# Altium PCB PCB.PcbDoc
Units mil, origin at the board's own origin, x right, y up, seen from the top; angles counter-clockwise.
Board outline 2500 x 2500 mil, 2 copper layers (Top Layer, Bottom Layer); 24 components, 42 nets, 148 pads, 107 vias.
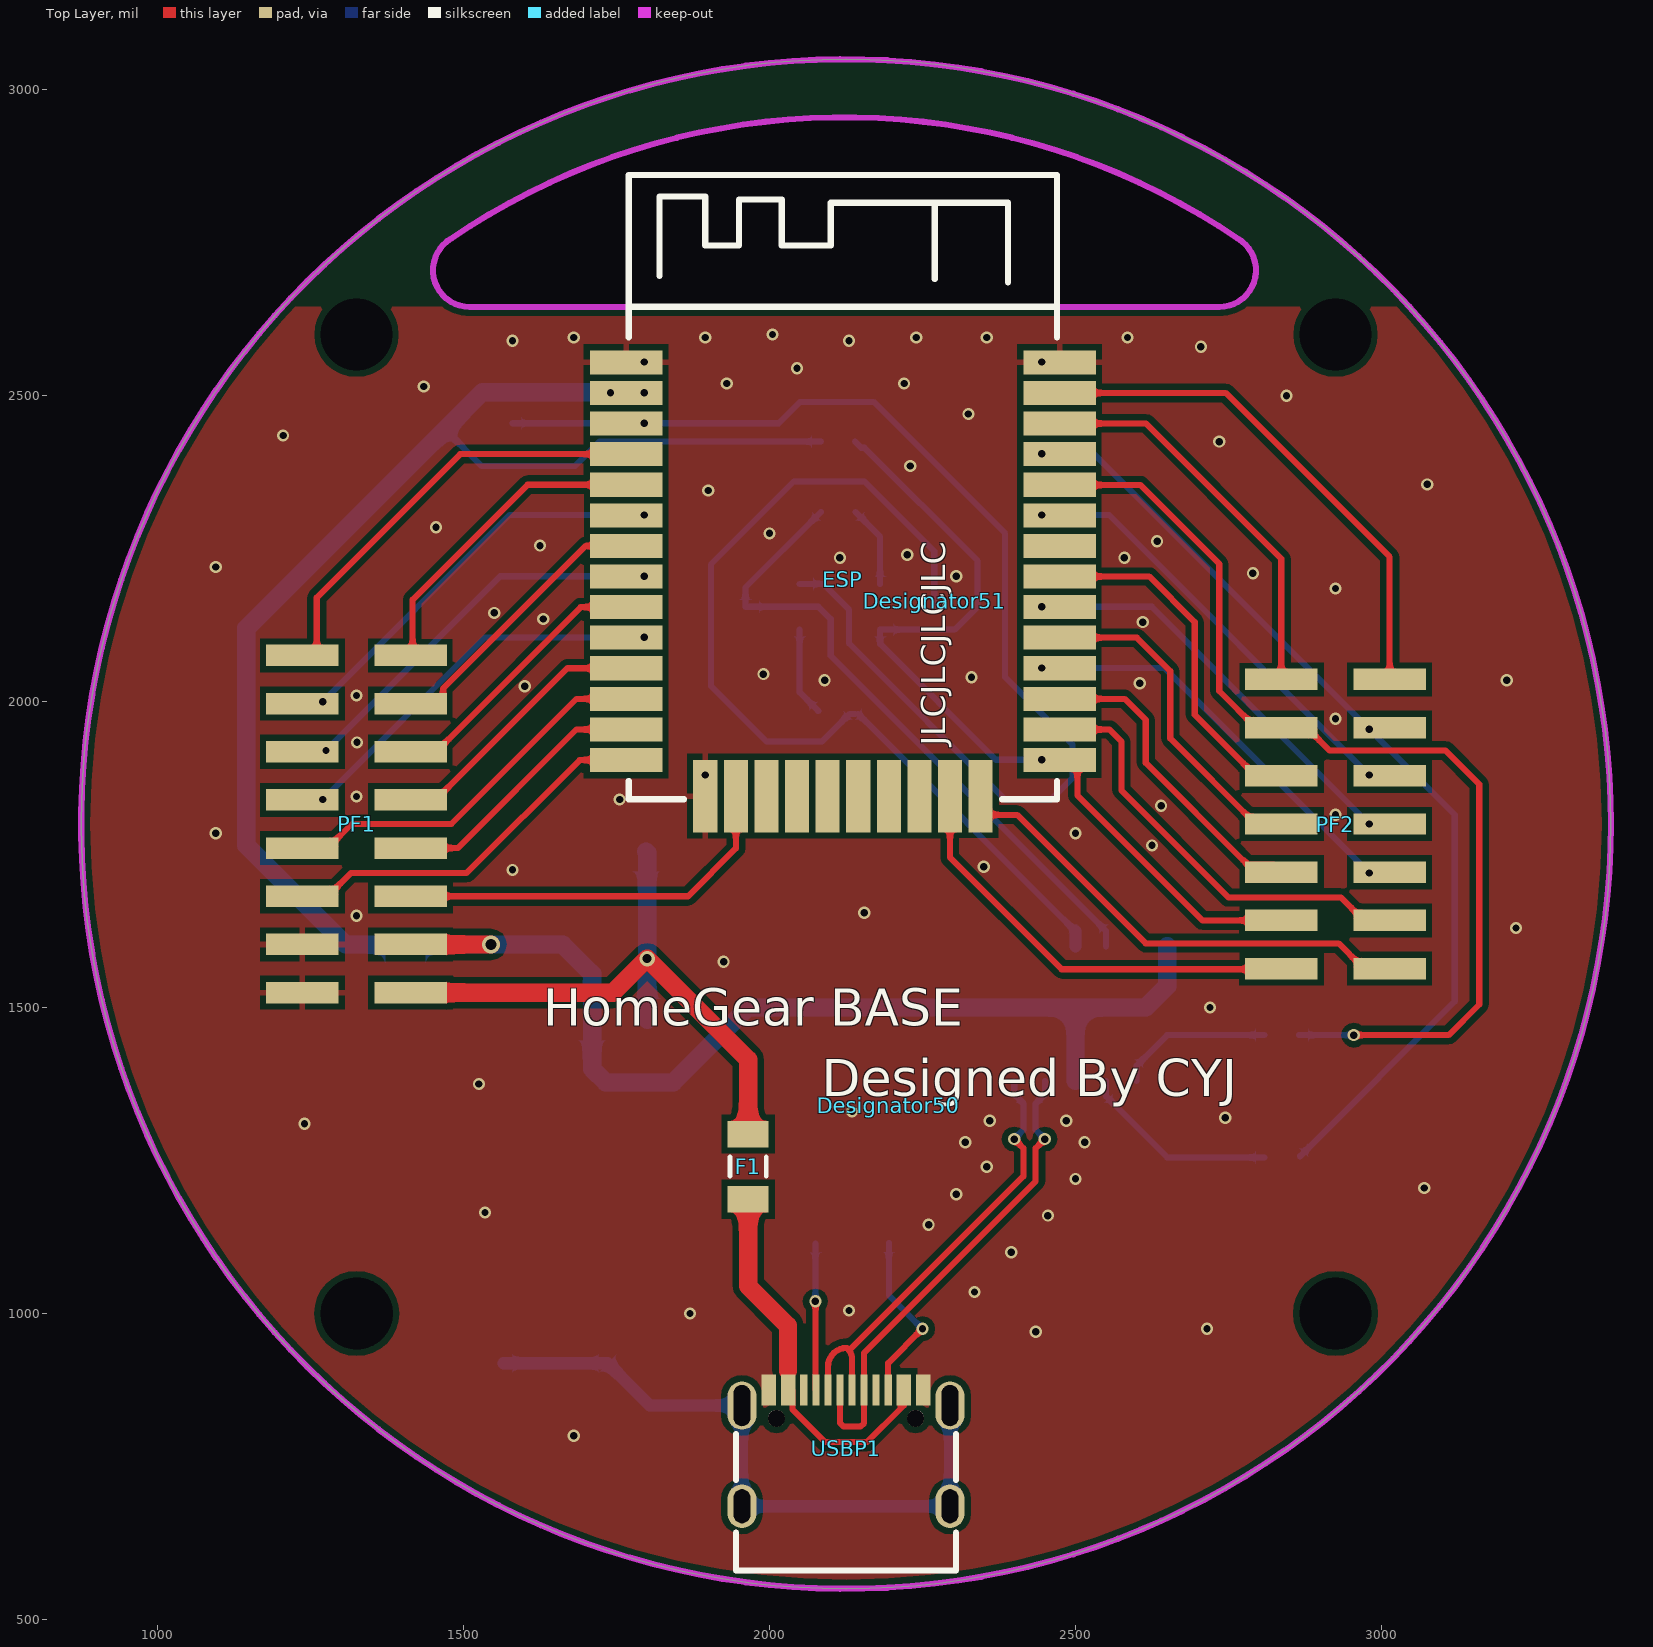
[diagram p0: Top Layer view]
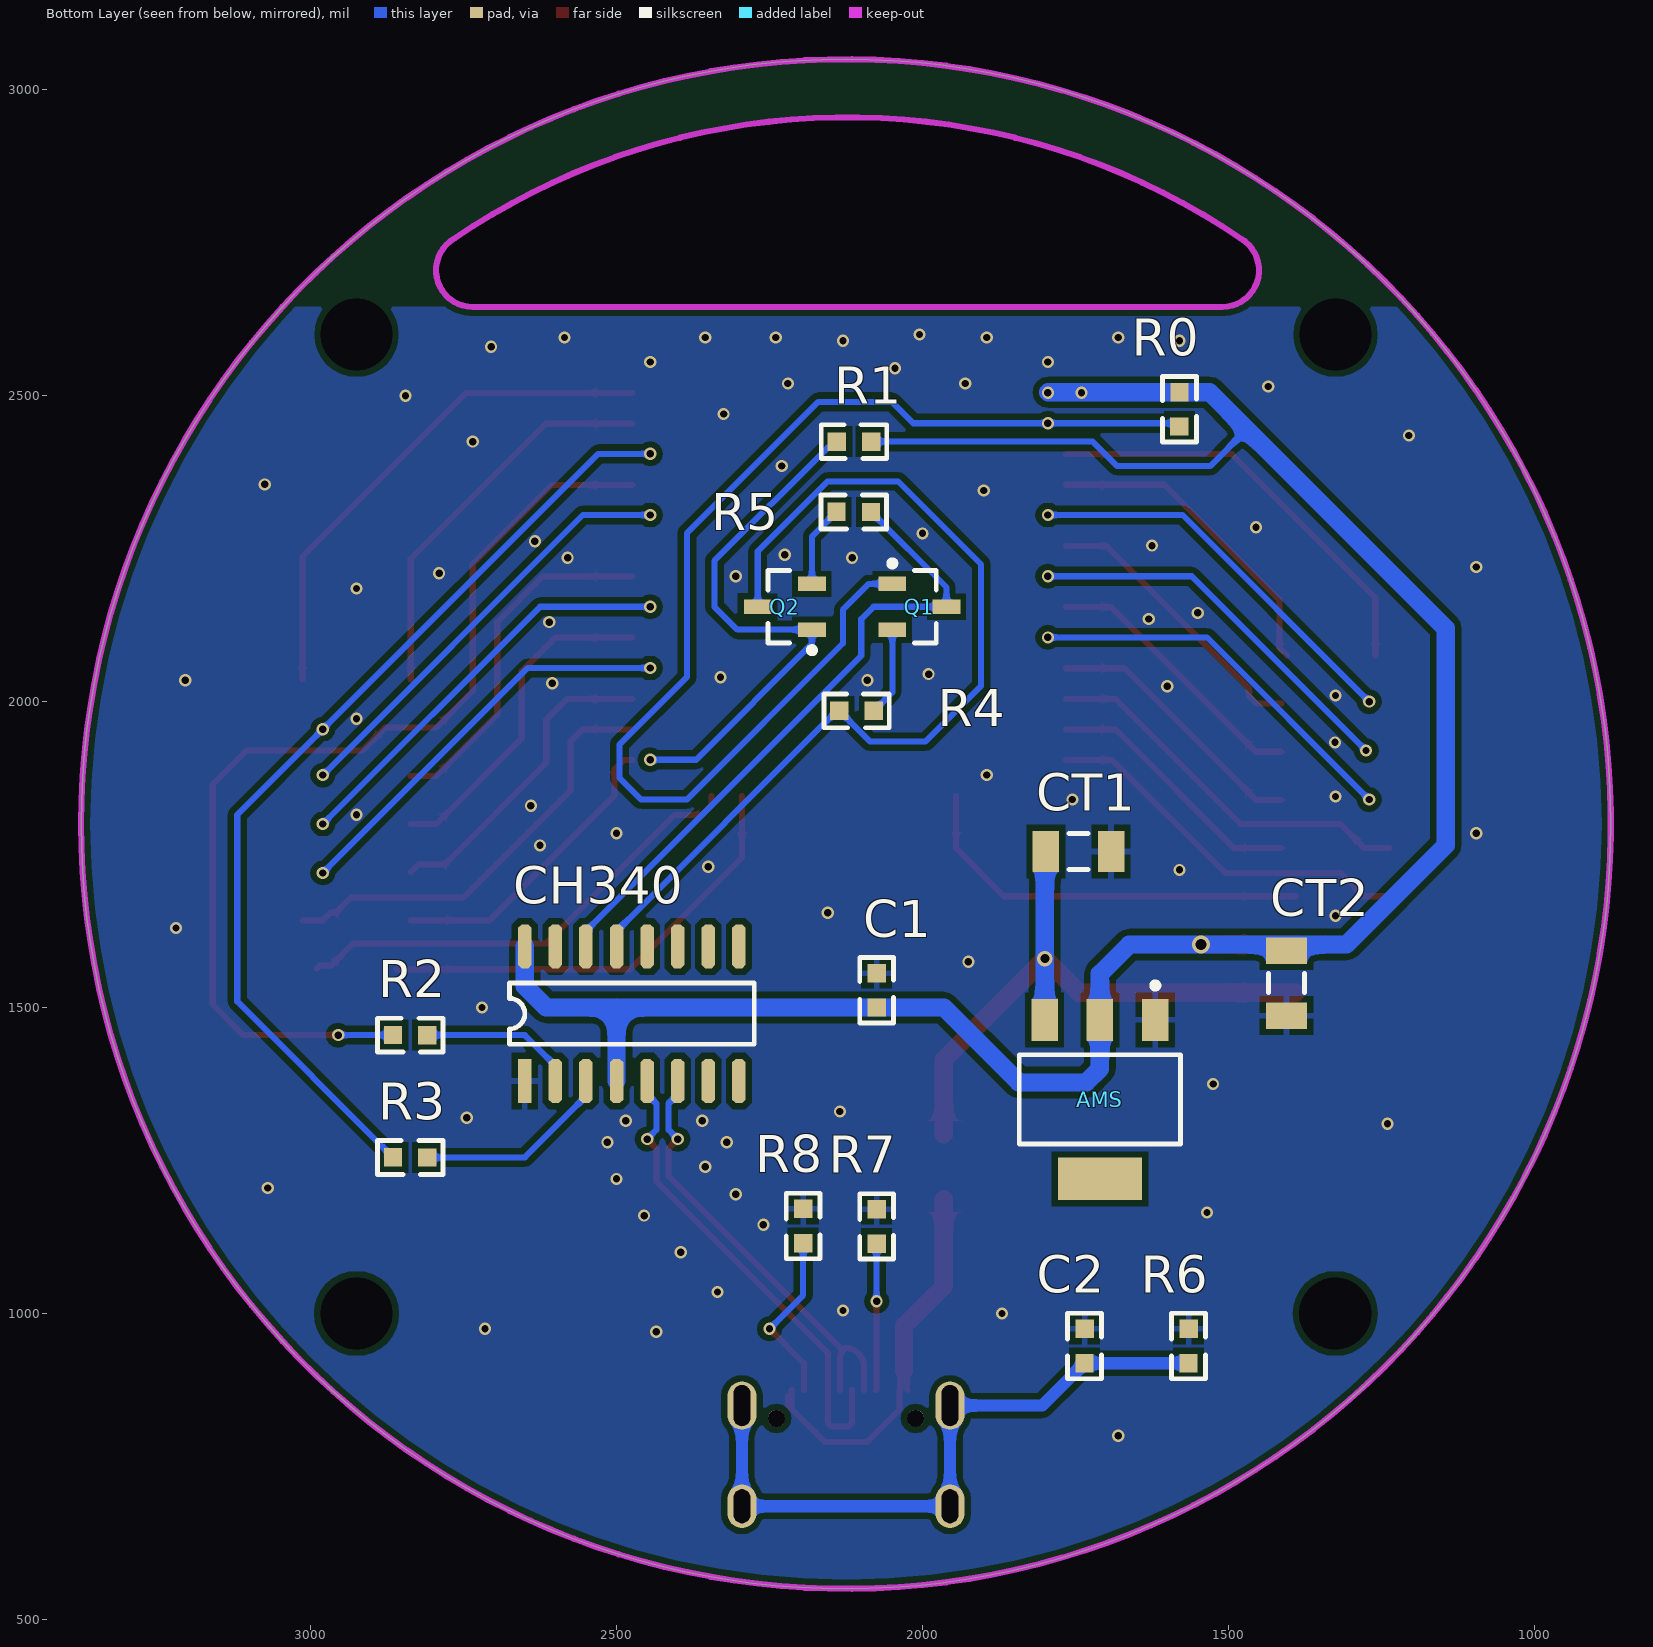
[diagram p1: Bottom Layer view, seen from below]
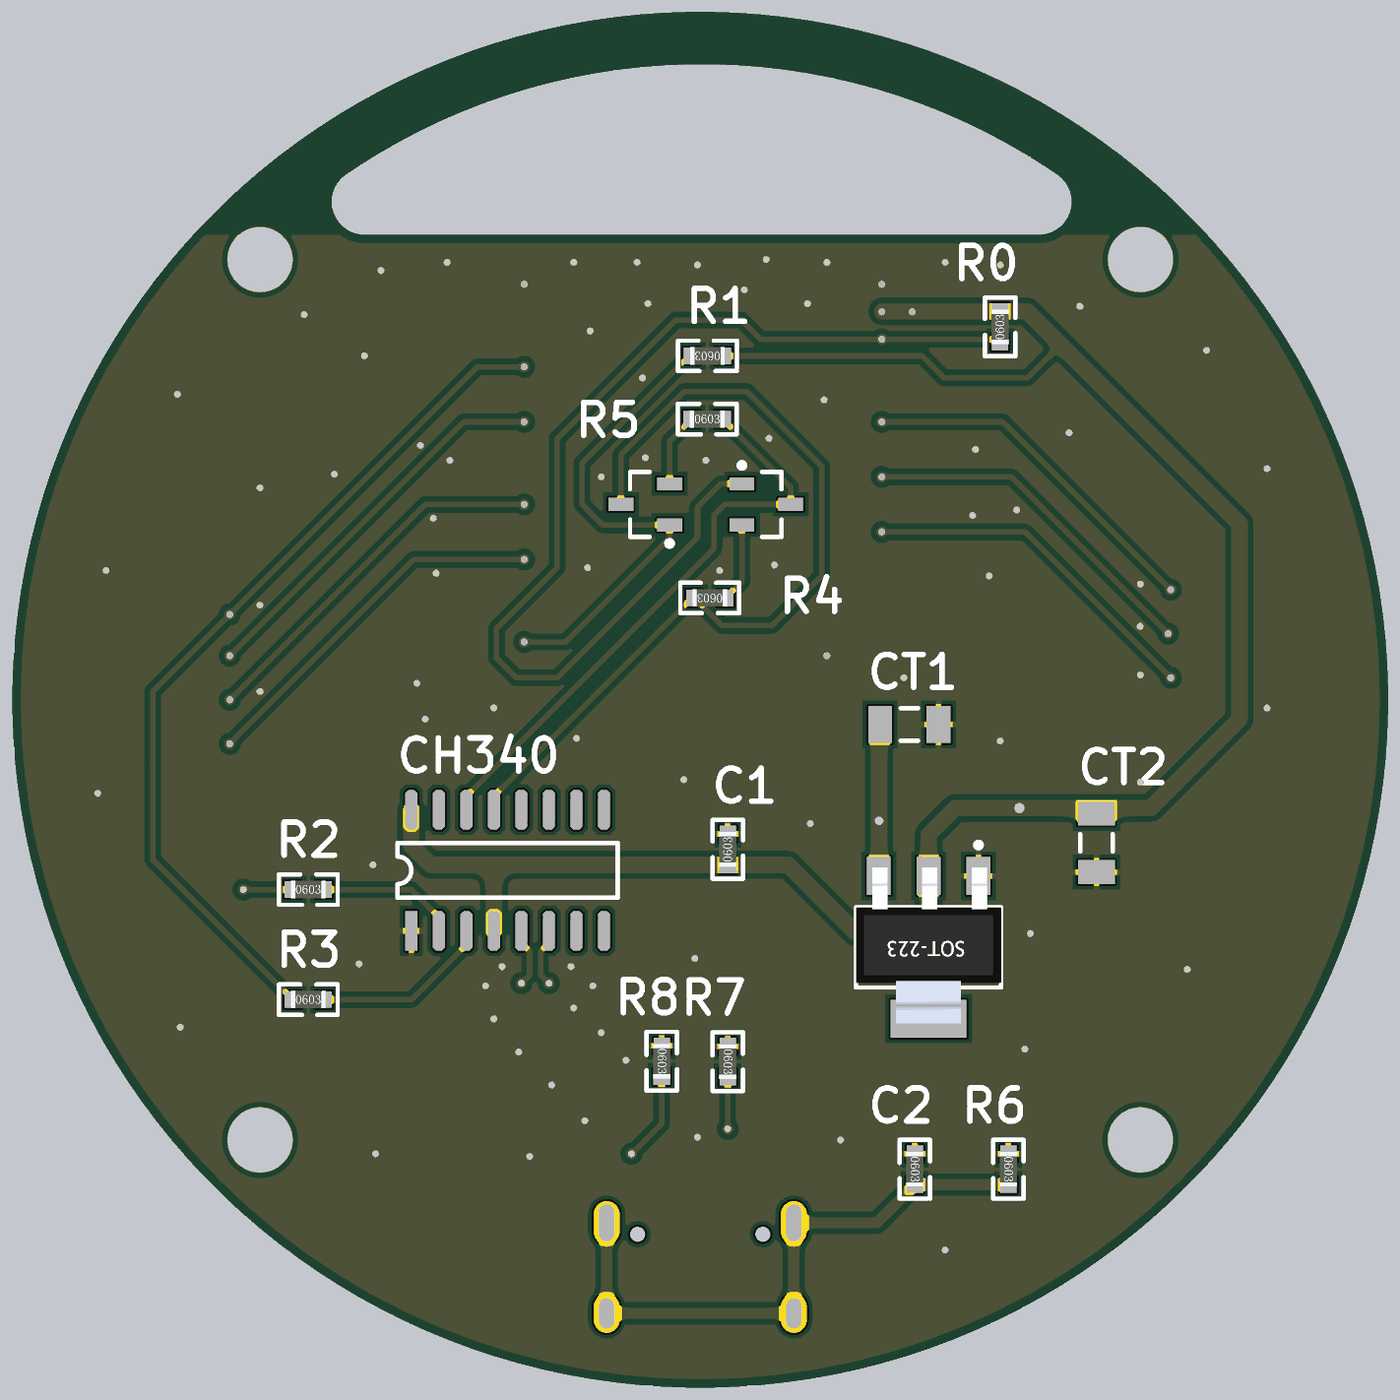
[diagram p2: 3D render of the assembled board from below, using the file's embedded part models]

## Layer stack, top to bottom
Top Solder: solder mask 0.4, Solder Resist, Dk 3.5
Top Layer: signal copper 1.4
Dielectric 1: dielectric 12.6, FR-4, Dk 4.8
Bottom Layer: signal copper 1.4
Bottom Solder: solder mask 0.4, Solder Resist, Dk 3.5

## Board outline
875,1800 ccw(c2125,1800) 2125,550 ccw(c2125,1800) 3375,1800 ccw(c2125,1800) 2125,3050 ccw(c2125,1800)
cut-out: 1510,2645 cw(c1510,2705) 1480,2756.96 cw(c2122.5,1813.74) 2765,2756.96 cw(c2735,2705) 2735,2645

## Design rules (kind name [scope] priority, off if disabled: settings)
Clearance [All] p1: gap=10 ignorepadtopadclearanceinfootprint=FALSE except(0: Arc-Hole Track-Hole SMDPad-Hole THPad-Hole Via-Hole Fill-Hole Poly-Hole Region-Hole Text-Hole; 5: Arc-Arc Arc-Track Arc-SMDPad Track-Track Track-SMDPad SMDPad-SMDPad SMDPad-THPad)
ComponentClearance [All] p1: gap=0 collisioncheckmode=3 verticalgap=0 showdistances=FALSE
DiffPairsRouting [All] p1: maxlimit=10 minlimit=10 mostfreqgap=10 toplayer_minwidth=10 toplayer_maxwidth=15 toplayer_prefwidth=10 bottomlayer_minwidth=10 bottomlayer_maxwidth=15 bottomlayer_prefwidth=10 maxuncoupledlength=500
PolygonConnect PolygonConnect_1 [HasFootprint('USB-C-SMD16P')] p1: connectstyle=Direct reliefconductorwidth=10 reliefentries=4 polygonreliefangle="90 Angle" airgapwidth=10
PolygonConnect [All] p2: thpad.connectstyle=Relief thpad.reliefconductorwidth=10 thpad.reliefentries=4 thpad.polygonreliefangle="90 Angle" thpad.airgapwidth=10 smdpad.connectstyle=Relief smdpad.reliefconductorwidth=10 smdpad.reliefentries=4 smdpad.polygonreliefangle="90 Angle" smdpad.airgapwidth=10 via.connectstyle=Direct via.reliefconductorwidth=10 via.reliefentries=4 via.polygonreliefangle="90 Angle" via.airgapwidth=10
RoutingVias [All] p1: holewidth=28 width=50 viastyle="Through Hole" minholewidth=28 minwidth=50 maxholewidth=28 maxwidth=50
SolderMaskExpansion [All] p1: expansion=4 istentingtop=FALSE
Width [All] p1: maxlimit=99 minlimit=8 preferedwidth=10 minimp=50.000000 maximp=50.000000 favimp=50.000000
28 further rules are at their usual default settings.

## Classes and differential pairs
component class Sheet: AMS C1 C2 CH340 CT1 CT2 ESP F1 PF1 PF2 Q1 Q2 R0 R1 R2 R3 R4 R5 R6 R7 R8 USBP1
differential pair D: +D_P -D_N

## Components (designator, comment, footprint, x,y, rotation, side; value= is the part's Value field where it differs from the comment)
AMS "AMS1117" SOT-223-2 1710,1350 r0 bottom
C1 "Cap" MY0603 2074.89,1530.44 r90 bottom value=0.1uF
C2 "Cap" MY0603 1735.11,944.56 r270 bottom value=0.1uF
CH340 "CH340C" SOP16 2650,1380 r180 bottom
CT1 "Cap Semi" My1206 1745,1755 r180 bottom value=10uF
CT2 "Cap Semi" My1206 1405,1540 r270 bottom value=10uF
Designator50 "Comment" DesignedByCYJ 2195,1340 r0 top
Designator51 "Comment" JLC_CLI_NO 2270,2165 r90 top
ESP "ESP32-S_Mod" ESP32-S_Mod 2125,2250 r0 top locked
F1 "Fuse" My1206 1965,1240 r90 top
PF1 "Header 8X2" SMD_FEM_HDR8x2_2.0MM 1325,1800 r270 top locked
PF2 "Header 7X2" SMD_FEM_HDR7x2_2.0MM 2925,1800 r270 top locked
Q1 "J3Y" SOT-23B_N 2005,2155 r180 bottom
Q2 "J3Y" SOT-23B_N 2225,2155 r0 bottom
R0 "Res" MY0603 1580,2480 r90 bottom value=12K
R1 "Res" MY0603 2114.2,2425 r0 bottom value=12K
R2 "Res2" MY0603 2835,1455 r180 bottom value=100
R3 "Res2" MY0603 2835,1255 r180 bottom value=100
R4 "Res2" MY0603 2110,1985 r0 bottom value=10K
R5 "Res2" MY0603 2110,2310 r180 bottom value=10K
R6 "Res" MY0603 1565.11,944.56 r270 bottom value=1M
R7 "Res" MY0603 2075,1140 r270 bottom value=5.1K
R8 "Res" MY0603 2195,1140.8 r270 bottom value=5.1K
USBP1 "USB2_TYPEC_16PIN" USB-C-SMD16P 2125,780 r0 top

## Footprints (in the part's own frame and the unit in brackets; to place one, negate y for a bottom-side part, rotate by r counter-clockwise, add the part's x,y. Pads: shape width x height; smd on the part's side, far side on the other; paste and mask are expansions set on the pad)
DesignedByCYJ [mil]
ESP32-S_Mod [mm]
  rect 3x1 smd: 1(-9.127,7.735) 2(-9.127,6.465) 3(-9.127,5.195) 4(-9.127,3.925) 5(-9.127,2.655) 6(-9.127,1.385) 7(-9.127,0.115) 8(-9.127,-1.155) 9(-9.127,-2.425) 10(-9.127,-3.695) 11(-9.127,-4.965) 12(-9.127,-6.235) 13(-9.127,-7.505) 14(-9.127,-8.775) 25(8.873,-8.775) 26(8.873,-7.505) 27(8.873,-6.235) 28(8.873,-4.965) 29(8.873,-3.695) 30(8.873,-2.425) 31(8.873,-1.155) 32(8.873,0.115) 33(8.873,1.385) 34(8.873,2.655) 35(8.873,3.925) 36(8.873,5.195) 37(8.873,6.465) 38(8.873,7.735)
  rect 1x3 smd: 15(-5.842,-10.275) 16(-4.572,-10.275) 17(-3.302,-10.275) 18(-2.032,-10.275) 19(-0.762,-10.275) 20(0.508,-10.275) 21(1.778,-10.275) 22(3.048,-10.275) 23(4.318,-10.275) 24(5.588,-10.275)
  silkscreen extent -9.02,-10.4 8.76,15.51
JLC_CLI_NO [mil]
MY0603 [mil]
  rect 30x30 smd: 1(-30.44,0.11) 2(25.8,0)
  silkscreen extent -56,-28 51,28, body extent -34,-16 29,16, height 18
My1206 [mm]
  rect 1.1x1.7 smd: 1(-1.35,0) 2(1.35,0)
  silkscreen extent -0.4,-0.75 0.4,0.75
SMD_FEM_HDR7x2_2.0MM [mm]
  rect 0.89x3 smd: 1(-6,-2.25) 2(-6,2.25) 3(-4,-2.25) 4(-4,2.25) 5(-2,-2.25) 6(-2,2.25) 7(0,-2.25) 8(0,2.25) 9(2,-2.25) 10(2,2.25) 11(4,-2.25) 12(4,2.25) 13(6,-2.25) 14(6,2.25)
SMD_FEM_HDR8x2_2.0MM [mm]
  rect 0.89x3 smd: 1(-7,-2.25) 2(-7,2.25) 3(-5,-2.25) 4(-5,2.25) 5(-3,-2.25) 6(-3,2.25) 7(-1,-2.25) 8(-1,2.25) 9(1,-2.25) 10(1,2.25) 11(3,-2.25) 12(3,2.25) 13(5,-2.25) 14(5,2.25) 15(7,-2.25) 16(7,2.25)
SOP16 [mil]
  rect 22x72 smd: 1(0,0)
  oct 22x72 smd: 2(50,0) 3(100,0) 4(150,0) 5(200,0) 6(250,0) 7(300,0) 8(350,0) 9(350,220) 10(300,220) 11(250,220) 12(200,220) 13(150,220) 14(100,220) 15(50,220) 16(0,220)
  silkscreen extent -25,60 375,160
SOT-23B_N [mm] "SOT23, 3-Leads, Body 2.9x1.3mm, Pitch 0.95mm, Lead Span 2.4mm, IPC Medium Density"
  rect 1.15x0.6 smd: 1(-1.125,0.95) 2(-1.125,-0.95) 3(1.125,0)
  silkscreen extent -1.25,-1.5 0.7,1.92, body extent -0.7,-1.5 0.7,1.5, height 1.14
SOT-223-2 [mm] "SOT-223/SC-73; 4 Leads; Body 6.7 x 7.3 mm, inc. leads (LxW max)"
  rect 1.1x1.75 smd: 1(-2.3,-3.3) 2(0,-3.3) 3(2.3,-3.3)
  rect 3.5x1.75 smd: 4(0,3.3)
  silkscreen extent -3.35,-4.85 3.35,1.85, body extent -3.35,-3.7 3.35,3.5, height 1.85
USB-C-SMD16P [mm]
  oval 1.2x2 hole 0.7 slot 1.7 at 90 deg: 1(-4.32,1.765) 2(4.32,1.765)
  oval 1.2x1.8 hole 0.7 slot 1.4 at 90 deg: 3(-4.32,-2.415) 4(4.32,-2.415)
  rect 0.3x1.3 smd: A1(-3.35,2.415) A4(-2.55,2.415) A5(-1.25,2.415) A6(-0.25,2.415) A7(0.25,2.415) A8(1.25,2.415) A9(2.55,2.415) A12(3.35,2.415) B1(3.05,2.415) B4(2.25,2.415) B5(1.75,2.415) B6(0.75,2.415) B7(-0.75,2.415) B8(-1.75,2.415) B9(-2.25,2.415) B12(-3.05,2.415)
  round 0.7 hole 0.7 unplated: ""(-2.89,1.235) ""(2.89,1.235)
  silkscreen extent -4.57,-5.08 4.57,0.57

## Part data
C1 C2: "Capacitor", LatestRevisionDate=17-Jul-2002, LatestRevisionNote="Re-released for DXP Platform.", PackageDescription="Radial Cap, Thru-Hole; 2 Leads; 0.3 in Pin Spacing", PackageReference=RAD-0.3, Published=8-Jun-2000, Publisher="Altium Limited"
CT1 CT2: "Capacitor (Semiconductor SIM Model)", LatestRevisionDate=29-May-2009, LatestRevisionNote="IPC-7351 Footprint Added.", PackageDescription="Chip Capacitor", PackageReference=C1206, Published=8-Jun-2000, Publisher="Altium Limited"
F1: library part "Fuse 1", LatestRevisionDate=17-Jul-2002, LatestRevisionNote="Re-released for DXP Platform.", PackageDescription="Thru-Hole; 2 Leads", PackageReference=PIN-W2/E2.8, Published=8-Jun-2000, Publisher="Altium Limited"
PF1: "Header, 8-Pin, Dual row", LatestRevisionDate=17-Jul-2002, LatestRevisionNote="Re-released for DXP Platform.", Publisher="Altium Limited"
PF2: "Header, 7-Pin, Dual row", LatestRevisionDate=17-Jul-2002, LatestRevisionNote="Re-released for DXP Platform.", Publisher="Altium Limited"
Q1 Q2: library part QNPN, "NPN Bipolar Transistor", LatestRevisionDate=29-May-2009, LatestRevisionNote="IPC-7351 Footprint Added.", PackageDescription="3-Pin SOT-23 Package 0.95 mm Pitch, 2.4 mm Lead Span", PackageReference=SOT-23B, PackageVersion=Aug-1999, Published=8-Jun-2000, Publisher="Altium Limited"
R0 R1 R6 R7 R8: library part Res2, "Resistor", LatestRevisionDate=17-Jul-2002, LatestRevisionNote="Re-released for DXP Platform.", PackageDescription="Axial Device, Thru-Hole; 2 Leads; 0.4 in Pin Spacing", PackageReference=AXIAL-0.4, Published=8-Jun-2000, Publisher="Altium Limited"
R2 R3 R4 R5: "Resistor", LatestRevisionDate=17-Jul-2002, LatestRevisionNote="Re-released for DXP Platform.", PackageDescription="Axial Device, Thru-Hole; 2 Leads; 0.4 in Pin Spacing", PackageReference=AXIAL-0.4, Published=8-Jun-2000, Publisher="Altium Limited"

## Free pads (board coordinates)
  round 0 hole 118.11: 2(1325,2600) 2(1325.21,1000) 2(2925,1000) 2(2925,2599.95)

## Via types
v1: diameter 20, hole 12, Top Layer to Bottom Layer, tented both sides, 87 vias
v2: diameter 20, hole 12, Top Layer to Bottom Layer, tented bottom, 18 vias
v3: diameter 30, hole 18, Top Layer to Bottom Layer, tented both sides, 1 vias
v4: diameter 25, hole 15, Top Layer to Bottom Layer, tented both sides, 1 vias

## Nets (pads, with @x,y where several pads share a name; then routed paths per layer and width w, separated by ;. In a path a pad name is that pad's centre, name@x,y a point inside that pad or via, vN(x,y) a via of type N, cw(c..) or ccw(c..) an arc to the next point about the centre after c; other vN are vias at no path point)
+3.3: AMS.2 C1.1 CH340.4 CH340.16 CT2.1 ESP.2 PF1.14 R0.2 R1.1 | length 3980.7
  Top Layer w30: PF1.14@1390,1603.15 1544.83,1603.15 v3(1544.91,1603.07)
  Bottom Layer w10: 1470,2445 1530,2385 1681.93,2385 1721.83,2424.89 R1.1
  Bottom Layer w30: v2@1794.2,2505.8 R0.2 1530.8,2505.8 1470,2445 1145,2120 1145,1765 1306.93,1603.07 v3(1544.91,1603.07) 1661.93,1603.07 1710,1555 AMS.2 1710,1400 1732.57,1377.43 1842.5,1377.43 1965.07,1500 C1.1 2500,1500 ; CH340.4 2500,1500 ; CH340.16 2650,1535 2615,1500 2500,1500
  other v2: 1740,2505 1795,2505
+5: AMS.3 CT1.1 F1.2 PF1.16 | length 1064.3
  Top Layer w30: PF1.16@1390,1524.41 1744.41,1524.41 v4(1800,1580) 1965,1415 F1.2
  Bottom Layer w30: CT1.1 1800,1753.15 1800,1480.47 AMS.3
CS1: ESP.29 PF2.7 | length 552.7
  Top Layer w10: ESP.29 2600.47,2104.53 2655,2050 2655,1939.88 2794.88,1800 PF2.7
D_N: CH340.6 USBP1.A7 USBP1.B7 | length 734.8
  Top Layer w10: USBP1.B7 2095.47,912.82 ; 2095.47,912.88 cw(c2126.41,912.88) 2120.4,943.24 cw(c2126.41,912.88) 2126.41,943.83 cw(c2110.06,925.21) 2129.97,939.97 cw(c2110.06,925.21) 2134.84,925.21 2134.84,925.15 USBP1.A7 ; 2130.31,939.63 2415,1224.32 2415,1270 v1(2400,1285)
  Bottom Layer w10: v1(2400,1285) 2415,1300 2415,1343.14 2409.14,1349 2408.57,1349 2400,1357.57 CH340.6
D_P: CH340.5 USBP1.A6 USBP1.B6 | length 792.6
  Top Layer w10: USBP1.A6 2115.45,874.8 2115.45,820.86 2121.3,815 2148.67,815 2154.53,820.86 USBP1.B6 2154.53,935.56 2435,1216.03 2435,1270 v1(2450,1285)
  Bottom Layer w10: v1(2450,1285) 2435,1300 2435,1343.14 2440.86,1349 2441.43,1349 2450,1357.57 CH340.5
DTR: CH340.13 Q2.3 R4.2 | length 1577.7
  Bottom Layer w10: R4.2@2140.8,1980 2130.8,1980 2085.81,1935 1995,1935 1904.14,2025.86 1904.14,2224.14 2040,2360 2155,2360 2269.29,2245.71 Q2.3 ; R4.2@2145,1980 CH340.13@2500,1625
  Bottom Layer w20: CH340.13 CH340.13@2500,1625
GND: AMS.1 C1.2 C2.1 CH340.1 CT1.2 CT2.2 ESP.1 ESP.15 ESP.38 PF1.13 PF1.15 R6.1 R7.1 R8.1 USBP1.A1 USBP1.A12 USBP1.B1 USBP1.B12
  other v1: 1680,800 2435,970 2715,975 1870,1000 2130,1005 2335,1035 2395,1100 2260,1145 2455,1160 1535,1165 2305,1195 3070,1205 2500,1220 2355,1240 2320,1280 2515,1280 1240,1310 2360,1315 2485,1315 2745,1320 2135,1330 1525,1375 2720,1500 1925,1575 3220,1630 1325,1650 2155,1655 1580,1725 2350,1730 2625,1765 1095,1785 2500,1785 2925,1815 2640,1830 1755,1840 1325,1845 1895,1880 1325.83,1933.39 2924.94,1971.92 1325,2010 1600,2025 2605,2030 2090,2035 3205,2035 2330,2040 1990,2045 2610,2130 1630,2135 1550,2145 2925,2185 2305,2205 2790,2210 1095,2220 2115,2235 2580,2235 2225,2240 1625,2255 2633.44,2262.13 2000,2275 1455,2285 1900,2345 3075,2355 2230,2385 2735,2425 1205,2435 2325,2470 2845,2500 1435,2515 1930,2520 2220,2520 2045,2545 1795,2555 2445,2555 2705,2580 1580,2590 2130,2590 1680,2595 1895,2595 2240,2595 2355,2595 2585,2595 2005,2600
IO0: ESP.25 PF2.11 Q2.1 R1.2 | length 1392.4
  Top Layer w10: ESP.25 2488.47,1904.53 2503.16,1889.85 2503.16,1846.84 2707.48,1642.52 PF2.11
  Bottom Layer w10: R1.2 2150,2415 2155,2415 2340,2230 2340,2155 2302.6,2117.6 Q2.1 2180.71,2094.29 2370,1905 v2(2445,1905)
IO2: ESP.24 PF2.14 | length 770.9
  Top Layer w10: ESP.24 2345,1829.68 2359.68,1815 2404.64,1815 2614.64,1605 2930,1605 2966.38,1568.62 2985.16,1568.62 PF2.14@2990,1563.78
IO4: ESP.26 PF2.12 | length 715.4
  Top Layer w10: ESP.26 2555.47,1954.53 2575,1935 2575,1855 2750,1680 2933.76,1680 2958.72,1655.04 2967.48,1655.04 2980,1642.52 PF2.12
IO12: ESP.14 PF1.11 | length 621.5
  Top Layer w10: PF1.11 1277.95,1681.89 1316.06,1720 1505,1720 1689.53,1904.53 ESP.14
IO13: ESP.16 PF1.12 | length 672.8
  Top Layer w10: PF1.12@1390,1681.89 1866.89,1681.89 1945,1760 ESP.16
IO14: ESP.13 PF1.10 | length 432.4
  Top Layer w10: PF1.10 1490.63,1760.63 1684.53,1954.53 ESP.13
IO15: ESP.23 PF2.13 | length 741
  Top Layer w10: ESP.23 2295,1745 2477.44,1562.56 PF2.13@2860,1562.56
IO25: ESP.10 PF1.7 | length 634.8
  Bottom Layer w10: v2(1270,1840) 1535,2105 v2(1795,2105)
IO26: ESP.11 PF1.8 | length 441.6
  Top Layer w10: PF1.8 1455.12,1839.37 1467.64,1851.89 1467.64,1852.64 1669.53,2054.53 ESP.11
IO27: ESP.12 PF1.9 | length 630.3
  Top Layer w10: PF1.9 1277.95,1760.63 1290.47,1773.15 1317.32,1800 1480,1800 1684.53,2004.53 ESP.12
IO32: ESP.8 PF1.5 | length 638.1
  Bottom Layer w10: v2(1275,1920) 1560,2205 v2(1795,2205)
IO33: ESP.9 PF1.6 | length 450
  Top Layer w10: PF1.6 1455.12,1918.11 1691.54,2154.53 ESP.9
IO34: ESP.6 PF1.3 | length 651.3
  Bottom Layer w10: v2(1270,2000) 1575,2305 v2(1795,2305)
IO35: ESP.7 PF1.4 | length 466
  Top Layer w10: PF1.4 1454.09,1996.85 1466.61,2009.37 1466.61,2021.61 1699.53,2254.53 ESP.7
MISO: ESP.31 PF2.5 | length 585.7
  Top Layer w10: ESP.31 2620.47,2204.53 2695,2130 2695,1978.62 2794.88,1878.74 PF2.5
MOSI: ESP.37 PF2.2 | length 850.5
  Top Layer w10: ESP.37 2745.47,2504.53 3013.58,2236.42 PF2.2
NetC2_2: C2.2 R6.2 USBP1.1 USBP1.2 USBP1.3 USBP1.4 | length 1087.8
  Bottom Layer w20: R6.2 C2.2 1804.38,849.49 USBP1.1 USBP1.3 USBP1.4 USBP1.2
NetCH340_2: CH340.2 R2.2 | length 254.9
  Bottom Layer w10: CH340.2 2600,1405 2650,1455 R2.2
NetCH340_3: CH340.3 R3.2 | length 325.6
  Bottom Layer w10: CH340.3 2550,1355 2650,1255 R3.2
NetF1_1: F1.1 USBP1.A4 USBP1.A9 USBP1.B4 USBP1.B9 | length 655
  Top Layer w10: USBP1.A4 2025.52,875.99 USBP1.A4@2025.52,895.68 ; USBP1.B9@2036.42,894.77 USBP1.B9 2037.33,874.18 2037.33,843.22 2090.39,790.16 2159.61,790.16 2214.07,844.62 2214.07,854.07 2213.75,874.91 USBP1.B4 ; 2214.22,844.76 2219.49,850.03 2219.49,865.23
  Top Layer w30: F1.1 1965,1045 2030.26,979.74 2030.26,906.22
NetQ1_2: Q1.2 R4.1 | length 145.3
  Bottom Layer w10: Q1.2 2049.29,2015.16 R4.1
NetQ2_2: Q2.2 R5.1 | length 134.4
  Bottom Layer w10: R5.1 2180.71,2269.84 Q2.2
NetR7_2: R7.2 USBP1.A5 | length 239.4
  Top Layer w10: v1(2075,1020) 2075.39,1019.61 2075.39,875.48 USBP1.A5
  Bottom Layer w10: v1(2075,1020) R7.2
NetR8_2: R8.2 USBP1.B5 | length 285.9
  Top Layer w10: USBP1.B5 2193.9,918.9 v1(2250,975)
  Bottom Layer w10: R8.2 2195,1030 v1(2250,975)
RST: ESP.3 Q1.1 R0.1 | length 1992.5
  Bottom Layer w10: R0.1@1580,2455 v2(1795,2455) 2015,2455 2050,2490 2170,2490 2385,2275 2385,2040 2495,1930 2495,1875 2460,1840 2385,1840 2130,2095 2130,2150 2087.6,2192.4 Q1.1
RTS: CH340.14 Q1.3 R5.2 | length 1075.1
  Bottom Layer w10: R5.2 1960.71,2186.51 Q1.3 2080,2155 2100,2135 2100,2075 2550,1625 CH340.14
RXD0: ESP.34 PF2.3 R2.1 | length 1685.4
  Top Layer w10: ESP.34 2474.74,2354.11 2605.89,2354.11 2735,2225 2735,2017.36 2794.88,1957.48 PF2.3 2877.95,1957.48 2915.43,1920 3105,1920 3160,1865 3160,1505 3110,1455 v1(2955,1455)
  Bottom Layer w10: R2.1 2865.55,1455 v1(2955,1455)
RXD1: ESP.27 PF2.9 | length 520.4
  Top Layer w10: ESP.27 2580.47,2004.53 2615,1970 2615,1900 2781.22,1733.78 2823.9,1733.78 PF2.9
SCK: ESP.30 PF2.8 | length 682
  Bottom Layer w10: v2(2445,2155) 2625,2155 v2(2980,1800)
SCL: ESP.36 PF2.1 | length 651
  Top Layer w10: ESP.36 2615.47,2454.53 2836.42,2233.58 PF2.1
SDA: ESP.33 PF2.6 | length 711
  Bottom Layer w10: v2(2445,2305) 2555,2305 v2(2980,1880)
SENSOR_VN: ESP.5 PF1.2 | length 523.1
  Top Layer w10: PF1.2@1404.14,2075.59 1416.66,2088.11 1416.66,2166.66 1604.53,2354.53 ESP.5
SENSOR_VP: ESP.4 PF1.1 | length 697.2
  Top Layer w10: PF1.1@1260,2075.59 1260,2170 1494.53,2404.53 ESP.4
TXD0: ESP.35 PF2.4 R3.1 | length 1582.2
  Bottom Layer w10: v2(2445,2405) 2530,2405 v2(2980,1955) 3120,1815 3120,1510 2872.94,1262.94 2872.94,1262.61 R3.1@2867.22,1256.9
TXD1: ESP.28 PF2.10 | length 673.8
  Bottom Layer w10: v2(2445,2055) 2645,2055 v2(2980,1720)
pads on no net: AMS.4 CH340.7 CH340.8 CH340.9 CH340.10 CH340.11 CH340.12 CH340.15 ESP.17 ESP.18 ESP.19 ESP.20 ESP.21 ESP.22 ESP.32 USBP1. USBP1.A8 USBP1.B8

## Polygon pours and split planes (outlines as drawn)
GND on Top Layer "NONET_L-01_P-001" (solid, remove dead copper, pour order 3): 3285,2645 3535,2395 3535,765 3225,455 1190,455 1190,470 710,950 710,2385 970,2645
no net on Top Layer "NONET_L-01_P-001" (solid, pour order 0): 1540,2645
GND on Bottom Layer "NONET_L-01_P-001" (solid, remove dead copper, pour order 5): 3285,2645 3535,2395 3535,765 3225,455 1190,455 1190,470 710,950 710,2385 970,2645

## Keep-outs
Keep-Out Layer:
  circle w10: c2125,1800 r1250
  lines w10: 1480,2756.96 cw(c2122.5,1813.74) 2765,2756.96 cw(c2735,2705) 2735,2645 1510,2645 cw(c1510,2705) 1480,2756.96

## Silkscreen, mask and mechanical layers (free items; w line width, h text height)
Top Overlay:
  text "HomeGear BASE" at 1630,1470 h60

## Text inside footprints (layer, text, board x,y; h text height)
Designator50: Top Overlay "Designed By CYJ" at 2085,1354.99 h60
Designator51: Top Overlay "JLCJLCJLCJLC" at 2287.13,1927.87 h39.37 r90